# EAGLE board Host-Board (EAGLE 6.4)
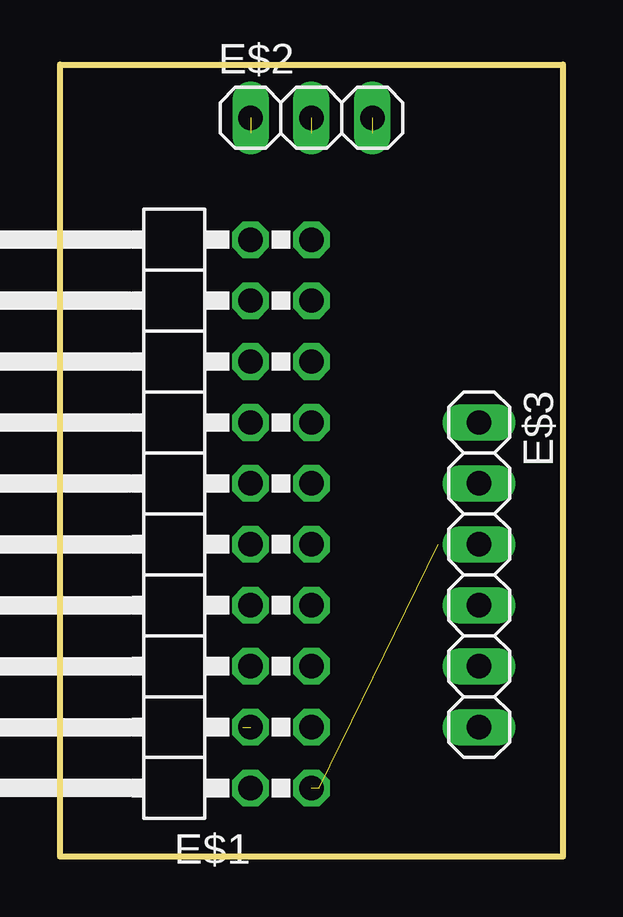
[diagram p0: board, top side]
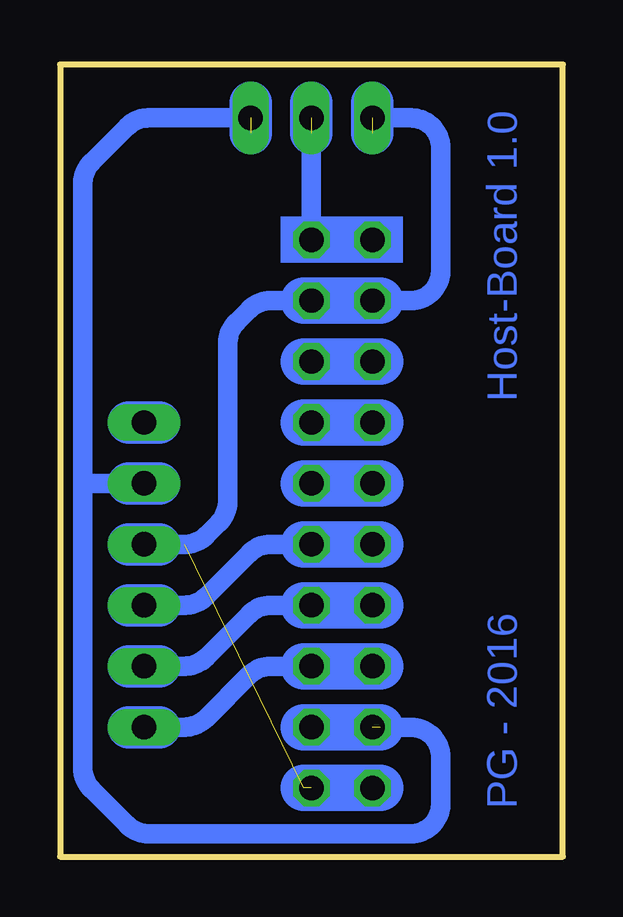
[diagram p1: board, bottom side, seen from below]

Size 20.95 x 33.02 mm. Coordinates in mm from the lower left corner, seen from the top.
Outline: 0,33.02 20.95,33.02 20.95,0 0,0 0,33.02
Copper layers (1*16): Top 0.035mm / dielectric 1.5mm / Bottom 0.035mm
Design rules "default": minimum track width 10mil, minimum drill 24mil, track to track 8mil, track to pad 8mil, pad to pad 8mil, via to via 8mil, smd to smd 8mil, copper to edge 40mil, drill to drill 8mil, minimum pad ring 10mil, minimum via ring 8mil, stop-mask expansion 4mil, vias tented up to drill 0mil, thermal gap 10mil

## Footprints (pad centres in the part's own frame; a part is rotated, then mirrored left to right if it is on the bottom)
2X10/90 = drill 1.016 octagon: 1 -11.43,-6.35; 2 -11.43,-3.81; 3 -8.89,-6.35; 4 -8.89,-3.81; 5 -6.35,-6.35; 6 -6.35,-3.81; 7 -3.81,-6.35; 8 -3.81,-3.81; 9 -1.27,-6.35; 10 -1.27,-3.81; 11 1.27,-6.35; 12 1.27,-3.81; 13 3.81,-6.35; 14 3.81,-3.81; 15 6.35,-6.35; 16 6.35,-3.81; 17 8.89,-6.35; 18 8.89,-3.81; 19 11.43,-6.35; 20 11.43,-3.81
1X03 = drill 1.016 long: 1 -2.54,0; 2 0,0; 3 2.54,0
1X06 = drill 1.016 long: 1 -6.35,0; 2 -3.81,0; 3 -1.27,0; 4 1.27,0; 5 3.81,0; 6 6.35,0

## Placement (x,y rotation side)
E$1  [2X10/90]  4.13,14.29 90 top
E$2  [1X03]  10.48,30.8 0 top
E$3  [1X06]  17.46,11.75 270 top

## Library data of the parts
E$1-E$3 = pinhead

## Nets
BUZZER: E$1.19 E$2.2
CE/RST: E$1.5 E$3.6
GND: E$1.1 E$1.17 E$1.18 E$3.3
RTC: E$1.7
SCLK: E$1.9 E$3.4
VCC: E$1.4 E$3.2

## Tracks (layer width: path | path; a pad name or v marks a point on that pad's centre or on a via)
BUZZER  (1 unrouted)
  Bottom 0.813: E$1.19 E$2.2
  Bottom 1.778: 10.48,30.16 10.48,31.43
CE/RST
  Bottom 0.61: 16.83,5.4 E$3.6
  Bottom 0.813: E$1.5 12.17,7.94 arc-45 13.07,7.57 14.87,5.77 arc45 15.77,5.4 16.83,5.4
  Bottom 1.778: 16.83,5.4 18.1,5.4
GND  (3 unrouted)
  Bottom 0.61: 16.83,13.02 E$3.3 | E$1.17
  Bottom 0.813: 16.83,13.02 15.77,13.02 arc-45 14.87,13.39 14.34,13.92 arc-45 13.97,14.81 13.97,21.38 arc45 13.6,22.28 13.07,22.81 arc45 12.17,23.18 10.8,23.18 E$1.17 | 7.94,30.8 6.35,30.8 arc90 5.08,29.53 5.08,24.45 arc90 6.35,23.18 7.62,23.18 E$1.18
  Bottom 1.778: 16.83,13.02 18.1,13.02 | 7.94,30.16 7.94,31.43
  Bottom 1.93: 7.62,23.18 10.8,23.18 | 7.62,2.86 10.8,2.86
PIO-B2
  Bottom 1.93: 7.62,20.64 10.8,20.64
PIO-B3
  Bottom 1.93: 7.62,18.1 10.8,18.1
PIO-B4
  Bottom 1.93: 7.62,15.56 10.8,15.56
PIO-B5
  Bottom 1.93: 7.62,13.02 10.8,13.02
PIO-B6
  Bottom 1.93: 7.62,10.48 10.8,10.48
PIO-B7
  Bottom 1.93: 7.62,7.94 10.8,7.94
RTC
  Bottom 0.61: 16.83,7.94 17.46,7.94
  Bottom 0.813: E$1.7 12.17,10.48 arc-45 13.07,10.11 14.87,8.31 arc45 15.77,7.94 16.83,7.94
  Bottom 1.778: 16.83,7.94 18.1,7.94
S$4
  Bottom 1.778: 16.83,18.1 18.1,18.1
SCLK
  Bottom 0.61: 16.83,10.48 E$3.4
  Bottom 0.813: E$1.9 12.17,13.02 arc-45 13.07,12.65 14.87,10.85 arc45 15.77,10.48 16.83,10.48
  Bottom 1.778: 16.83,10.48 18.1,10.48
VCC  (2 unrouted)
  Bottom 0.61: 18.1,15.56 E$3.2
  Bottom 0.813: E$1.4 6.35,5.4 arc90 5.08,4.13 5.08,2.22 arc90 6.35,0.95 17.25,0.95 arc45 18.15,1.32 19.63,2.8 arc45 20,3.7 20,15.56 | 13.02,30.8 17.25,30.8 arc-45 18.15,30.43 19.63,28.95 arc-45 20,28.05 20,15.56 | 20,15.56 18.1,15.56
  Bottom 1.778: 16.83,15.56 18.1,15.56 | 13.02,30.16 13.02,31.43
  Bottom 1.93: 7.62,5.4 10.8,5.4
(copper drawn outside any net)
  shapes: Bottom area x1

## Text on the board
Bottom: Host-Board 1.0 | PG - 2016
Document: GND | I/O | VCC | BUZZER | GND | VCC | PIO-B5 | GND | PIO-B6 | SCLK | PIO-B7 | I/O | VCC | CE/RST | GND